# Altium PCB KB CTRL.PcbDoc
Units mil, origin at the board's own origin, x right, y up, seen from the top; angles counter-clockwise.
Board outline 1968.5 x 1574.79 mil, 2 copper layers (Top Layer, Bottom Layer); 30 components, 29 nets, 140 pads, 23 vias.
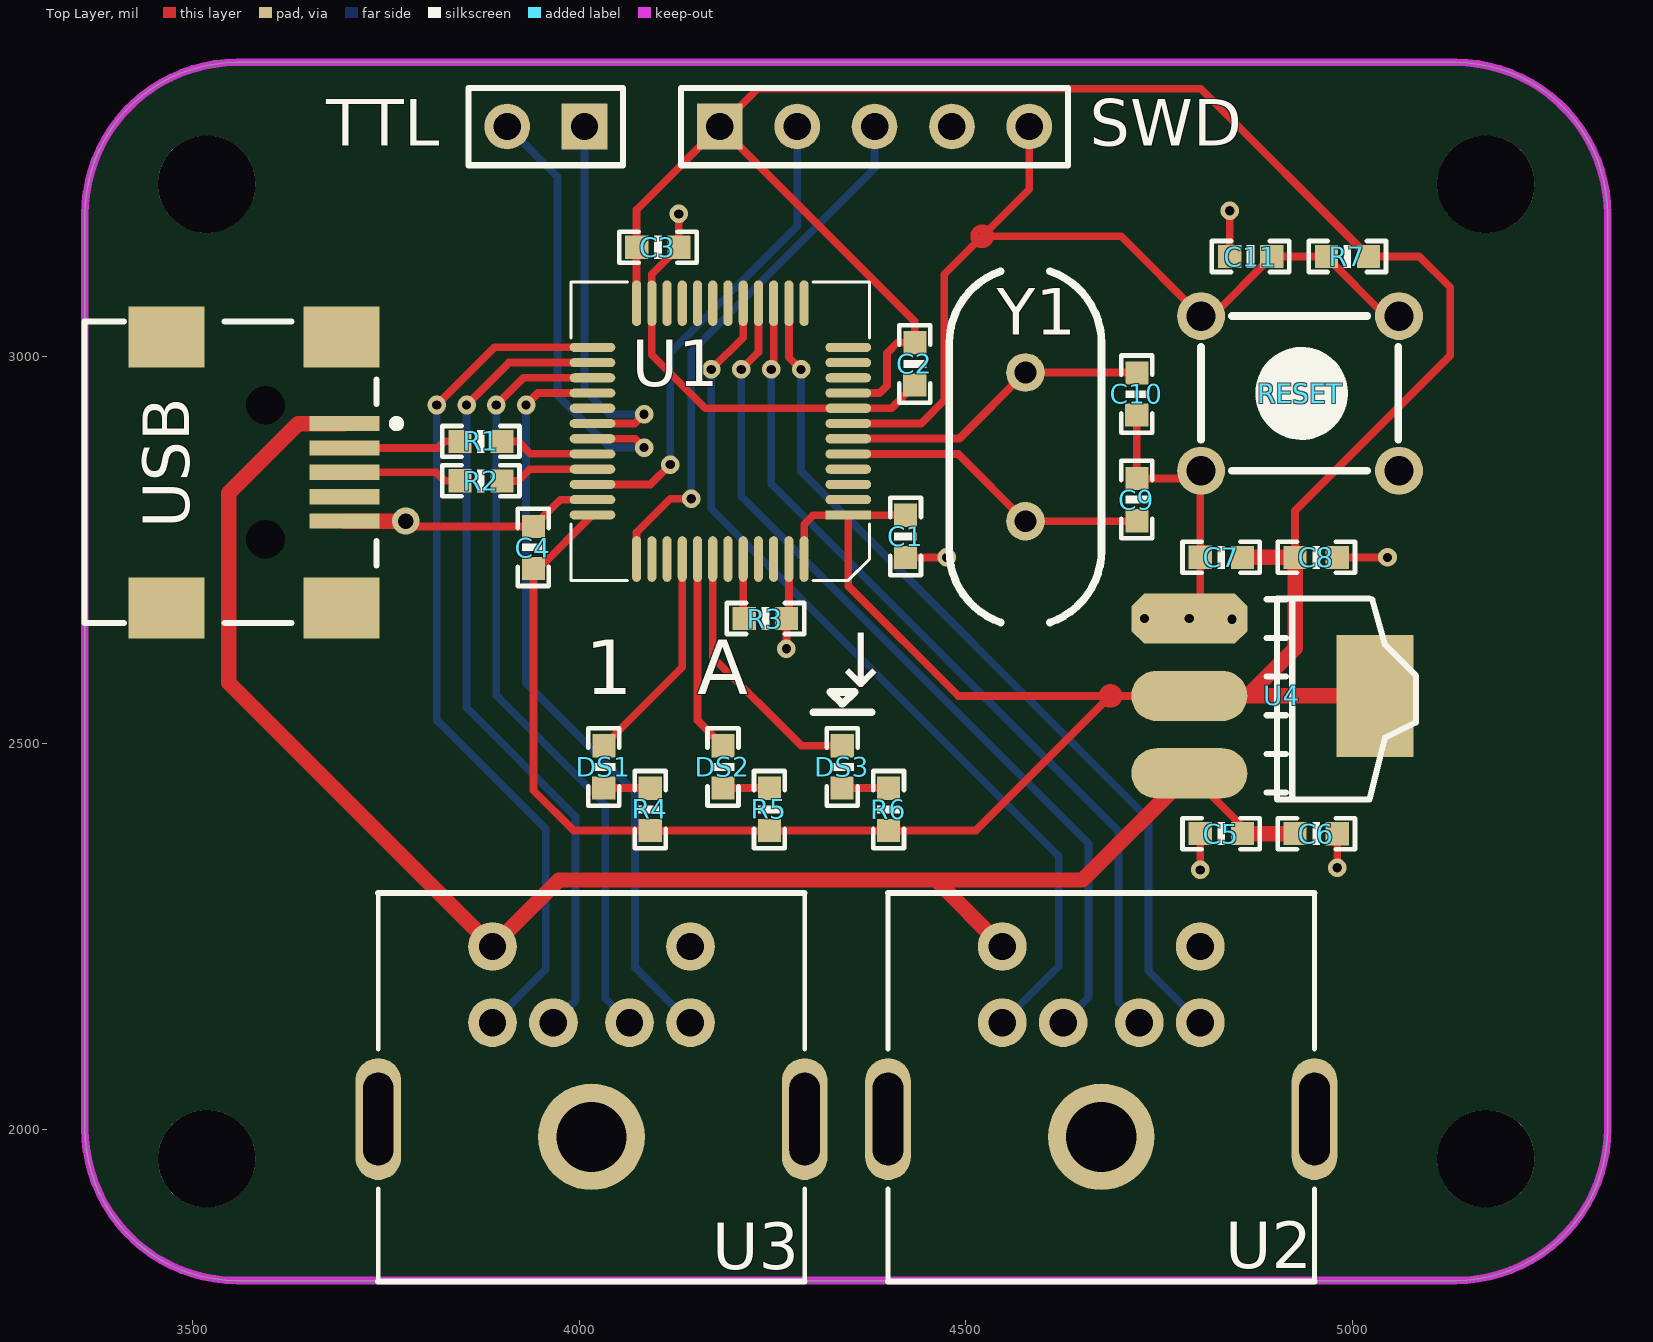
[diagram p0: Top Layer view]
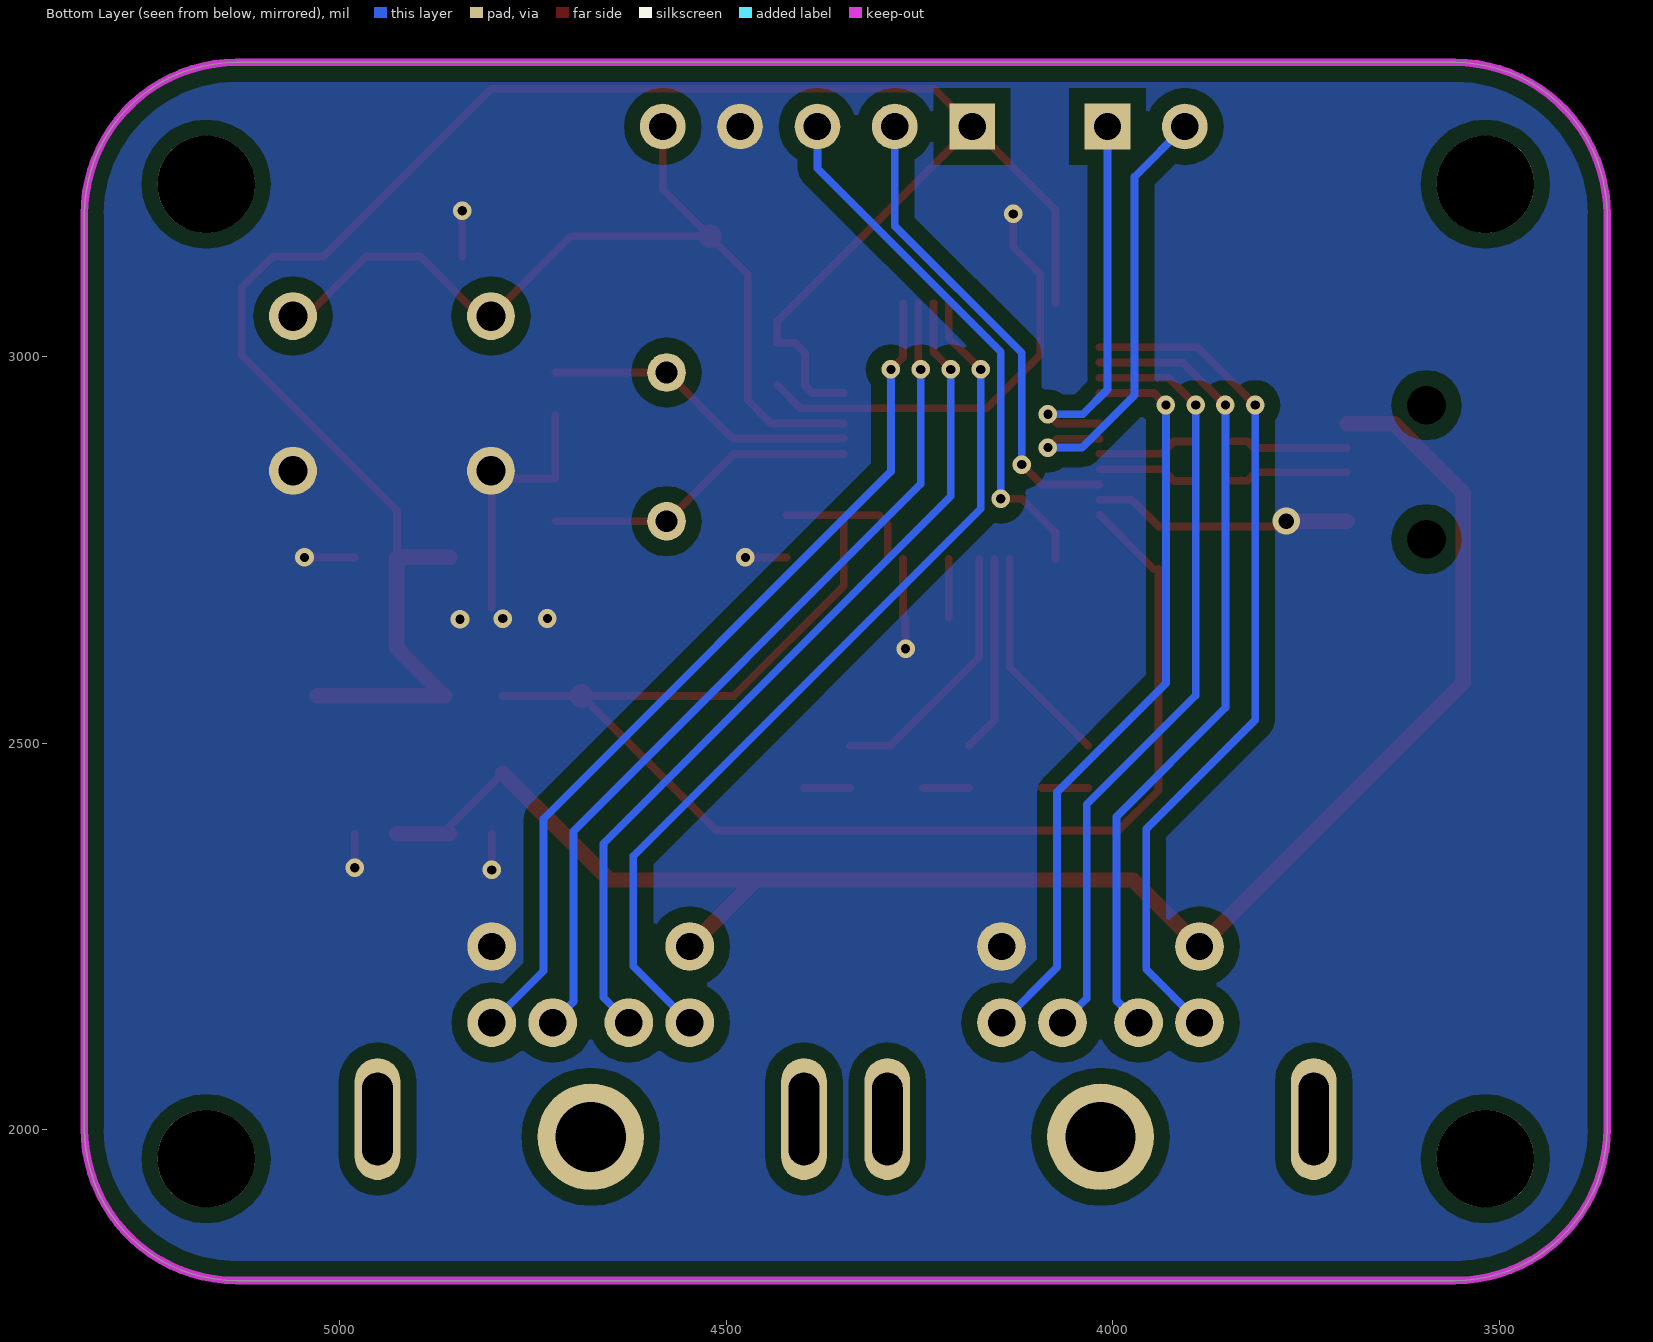
[diagram p1: Bottom Layer view, seen from below]

## Layer stack, top to bottom
Top Layer: signal copper 1.4
Dielectric: dielectric 12.6, FR-4, Dk 4.8
Bottom Layer: signal copper 1.4

## Board outline
3361.15,2002.06 3361.15,3183.15 cw(c3558,3183.15) 3558,3380 5132.8,3380 cw(c5132.8,3183.15) 5329.65,3183.15 5329.65,2002.06 cw(c5132.8,2002.06) 5132.8,1805.21 3558,1805.21 cw(c3558,2002.06)

## Design rules (kind name [scope] priority, off if disabled: settings)
Clearance Clearance_1 [InComponent('U1')] p1: gap=6
Clearance [All] p2: gap=8
ComponentClearance [All] p1: gap=0 collisioncheckmode=3 verticalgap=0 showdistances=FALSE
DiffPairsRouting [All] p1: maxlimit=10 minlimit=10 mostfreqgap=10 maxuncoupledlength=500
HoleSize [All] p1: absolutevalues=TRUE maxlimit=1000 minlimit=1 maxpercent=80.000 minpercent=20.000
HoleToHoleClearance [All] p1: gap=0 allowstackedmicrovias=TRUE
MinimumSolderMaskSliver [All] p1: minsoldermaskwidth=0
PlaneConnect [All] p1: planeconnectstyle=Direct reliefexpansion=20 reliefentries=4 reliefconductorwidth=10 reliefairgap=10
PolygonConnect [All] p1: connectstyle=Direct reliefconductorwidth=10 reliefentries=4 polygonreliefangle="90 Angle" airgapwidth=10
RoutingVias [All] p1: holewidth=28 width=50 viastyle="Through Hole" minholewidth=28 minwidth=50 maxholewidth=28 maxwidth=50
SilkToSilkClearance [All] p1: silktosilkclearance=0
SilkToSolderMaskClearance [IsPad] p1: minsilkscreentomaskgap=0 clearancetoexposedcopper=TRUE
SolderMaskExpansion [All] p1: expansion=4
Width [All] p1: maxlimit=30 minlimit=10 preferedwidth=10
20 further rules are at their usual default settings.

## Classes and differential pairs
differential pair OTG: +OTG_P -OTG_N
differential pair USB: +USB_P -USB_N
differential pair OSC: +OSC_P -OSC_N

## Components (designator, comment, footprint, x,y, rotation, side; value= is the part's Value field where it differs from the comment)
C1 "104" 0603P 4422,2767 r90 top
C2 "104" 0603P 4434,2990 r90 top
C3 "104" 0603P 4102,3141 r180 top
C4 "104" 0603P 3941,2753 r270 top
C5 "10uf" 0603P 4830,2383 r0 top
C6 "104" 0603P 4953,2382.87 r180 top
C7 "10uf" 0603P 4830,2740.13 r0 top
C8 "104" 0603P 4953,2740 r180 top
C9 "22pf" 0603P 4721.13,2815 r270 top
C10 "22pf" 0603P 4721,2951 r90 top
C11 "104" 0603P 4868,3129 r0 top
DS1 "LED1" 0603P 4032,2469 r90 top
DS2 "LED1" 0603P 4186,2469 r90 top
DS3 "LED1" 0603P 4340,2469 r90 top
R1 "10K" 0603P 3873,2890 r0 top
R2 "10K" 0603P 3873,2839 r0 top
R3 "10K" 0603P 4241,2661 r180 top
R4 "10K" 0603P 4092,2414 r90 top
R5 "10K" 0603P 4246,2414 r90 top
R6 "10K" 0603P 4400,2414 r90 top
R7 "10K" 0603P 4993,3129 r0 top
RESET "KEY_M" KEY_M 4804,3052 r0 top (schematic designator RESET?)
SWD "IIS" HDR1X5 4182,3297 r0 top (schematic designator P1)
TTL "" HDR1X2 4007,3297 r180 top (schematic designator P2)
U1 "STM32F103C8T6" LQFP48 4348,2795 r180 top
U2 "PS/2" PS2-6PIN 4675,1804 r180 top locked
U3 "PS/2" PS2-6PIN 4016,1804 r180 top locked
U4 "AMS1117-3.3" AMS1117 4789,2661 r270 top
USB "USB" USB/SM0.8-6H5 3388,2850 r180 top locked
Y1 "8MHz" XTAL_US 4577,2979 r270 top

## Footprints (in the part's own frame and the unit in brackets; to place one, negate y for a bottom-side part, rotate by r counter-clockwise, add the part's x,y. Pads: shape width x height; smd on the part's side, far side on the other; paste and mask are expansions set on the pad)
0603P [mil]
  rect 30x30 smd: 1(-27,0) 2(27.5,-0.06)
  silkscreen extent -50,-20 50,20
AMS1117 [mil]
  oct 65x150 smd: 1(0.03,-0.06)
  oval 65x150 smd: 2(100.03,-0.06) 3(200.03,-0.06)
  rect 157.48x100 smd: 4(100.03,239.94)
  silkscreen extent -26,100 234,293
HDR1X2 [mm]
  rect 1.5x1.5 hole 0.9: 1(0,0)
  round 1.5 hole 0.9: 2(2.54,0)
  silkscreen extent -1.27,-1.27 3.81,1.27
HDR1X5 [mm]
  rect 1.5x1.5 hole 0.9: 1(0,0)
  round 1.5 hole 0.9: 2(2.54,0) 3(5.08,0) 4(7.62,0) 5(10.16,0)
  silkscreen extent -1.27,-1.27 11.43,1.27
KEY_M [mil]
  round 62 hole 38: 1(0,0) 1(255.91,0) 2(0,-200) 2(255.91,-200)
  silkscreen extent 0,-200 255,0
LQFP48 [mm]
  rect 1.5x0.3 smd: 1(0,0)
  oval 1.5x0.3 smd: 2(0,-0.5) 3(0,-1) 4(0,-1.5) 5(0,-2) 6(0,-2.5) 7(0,-3) 8(0,-3.5) 9(0,-4) 10(0,-4.5) 11(0,-5) 12(0,-5.5) 25(8.4,-5.5) 26(8.4,-5) 27(8.4,-4.5) 28(8.4,-4) 29(8.4,-3.5) 30(8.4,-3) 31(8.4,-2.5) 32(8.4,-2) 33(8.4,-1.5) 34(8.4,-1) 35(8.4,-0.5) 36(8.4,0)
  oval 0.3x1.5 smd: 13(1.45,-6.95) 14(1.95,-6.95) 15(2.45,-6.95) 16(2.95,-6.95) 17(3.45,-6.95) 18(3.95,-6.95) 19(4.45,-6.95) 20(4.95,-6.95) 21(5.45,-6.95) 22(5.95,-6.95) 23(6.45,-6.95) 24(6.95,-6.95) 37(6.95,1.45) 38(6.45,1.45) 39(5.95,1.45) 40(5.45,1.45) 41(4.95,1.45) 42(4.45,1.45) 43(3.95,1.45) 44(3.45,1.45) 45(2.95,1.45) 46(2.45,1.45) 47(1.95,1.45) 48(1.45,1.45)
  silkscreen extent -0.7,-7.65 9.1,2.15
PS2-6PIN [mm]
  round 1.6 hole 0.9: 1(-1.25,-8.5) 2(1.25,-8.5) 3(-3.25,-8.5) 4(3.25,-8.5) 5(-3.25,-11) 6(3.25,-11)
  oval 1.5x4 hole 1 slot 3.048 at 90 deg: 7(-7,-5.334) 9(7,-5.334)
  round 3.5 hole 2.3: S(0,-4.75)
  silkscreen extent -7,-12.75 7,0
USB/SM0.8-6H5 [mm]
  rect 2.3x0.5 smd: 1(-7.85,-1.6) 2(-7.85,-0.8) 3(-7.85,0) 4(-7.85,0.8) 5(-7.85,1.6)
  rect 2.5x2 smd: 6(-7.75,4.45) 7(-1.996,4.45) 8(-7.75,-4.45) 9(-1.996,-4.45)
  round 0.6 hole 1.27 unplated: MH1(-5.25,2.2) MH2(-5.25,-2.2)
  silkscreen extent -9.68,-4.95 0.7,4.95
XTAL_US [mil]
  round 50 hole 28: 1(0,0) 2(192.13,0)
  silkscreen extent -131,-98 323,98

## Part data
C1 C2 C3 C4 C5 C6 C7 C8 C9 C10 C11: library part C
DS1 DS2 DS3: library part LED2, "Typical RED, GREEN, YELLOW, AMBER GaAs LED"
R1 R2 R3 R4 R5 R6 R7: library part R
SWD: library part "Header 5", "Header, 5-Pin"
TTL: library part "Header 2", "Header, 2-Pin"
U2 U3: library part P/S2
U4: library part AMS1117
USB: library part USB5
Y1: library part XTAL, "Crystal Oscillator"

## Free pads (board coordinates)
  round 125.98 hole 125.98: ""(3518.63,1962.69) ""(3518.63,3222.54) ""(5172.17,1962.69) ""(5172.17,3222.54)

## Via types
v1: diameter 24, hole 12, Top Layer to Bottom Layer, 22 vias
v2: diameter 35, hole 20, Top Layer to Bottom Layer, 1 vias

## Nets (pads, with @x,y where several pads share a name; then routed paths per layer and width w, separated by ;. In a path a pad name is that pad's centre, name@x,y a point inside that pad or via, vN(x,y) a via of type N, cw(c..) or ccw(c..) an arc to the next point about the centre after c; other vN are vias at no path point)
3.3V: C1.2 C2.2 C3.2 C4.2 C7.2 C8.2 R4.1 R5.1 R6.1 R7.2 SWD.1 U1.1 U1.9 U1.24 U1.36 U1.48 U4.2 U4.4 | length 4796.4
  Top Layer w10: C4.2 3940.94,2439.06 3993,2387 R4.1 R5.1 R6.1 4513,2387 4686.97,2560.97 ; C4.2@3947.79,2725.5 U1.36 ; U1.24 4074.38,3189.38 SWD.1 ; U1.48 4290.91,2782.91 4302.5,2794.5 U1.1@4348,2794.5 ; U1.1 U1.1@4348,2794.5 ; U1.9 4388.48,2952.48 4398,2962 4398,3004 4411.5,3017.5 C2.2 4434.06,3044.94 SWD.1 ; C1.2 U1.1@4348,2794.5 ; U4.2 4686.97,2560.97 ; C8.2 4925.5,2800.5 5126,3001 5126,3089 5086.06,3128.94 R7.2 4803.44,3346 4231,3346 SWD.1 ; U1.1@4348,2794.5 4348,2703 4490.03,2560.97 4686.97,2560.97 ; 4697.25,2560.97 ccw(c4686.97,2560.97) 4697.25,2560.97
  Top Layer w20: C7.2 C8.2 4925.5,2622.47 4864,2560.97 U4.4
5V: C5.2 C6.2 U2.6 U3.6 U4.3 USB.1 | length 2204.1
  Top Layer w10: U4.3 4857.5,2392.4 C5.2
  Top Layer w20: USB.1 3636.99,2912.99 3547,2823 3547,2578.12 U3.6 3973.98,2323 4461.12,2323 ; U2.6 4461.12,2323 ; U4.3 4650.97,2323 4461.12,2323 ; C5.2 C6.2
GND: C1.1 C2.1 C3.1 C4.1 C5.1 C6.1 C7.1 C8.1 C9.1 C10.1 C11.1 R3.1 RESET.2 SWD.4 U1.8 U1.23 U1.35 U1.47 U2.5 U3.5 U4.1 USB.5 | length 1616.7
  Top Layer w10: v2@3783,2780 C4.1 3975.69,2814.69 U1.35 ; v1(4129,3184) C3.1 4094.06,3106.06 U1.23 4094.06,3001.94 4163.2,2932.8 U1.8 4403.8,2932.8 C2.1 ; v1(4268,2622) R3.1 ; R3.1@4271.23,2664.23 U1.47 ; C1.1 v1(4475,2740) ; C10.1 4721,2842.13 RESET.2@4794.13,2842.13 ; v1(4803,2336) C5.1 ; U4.1@4803,2675.03 C7.1 RESET.2@4803,2851 ; C11.1 v1(4841,3188) ; v1(4980,2339) C6.1 ; C8.1 v1(5045,2740)
  Top Layer w20: USB.5 v2(3775.99,2787.01)
  other v1: 4844,2660 4731,2661 4788.94,2660.97
LED1: DS1.2 U1.40 | length 283.4
  Top Layer w10: DS1.2 4133.43,2597.87 U1.40
LED2: DS2.2 U1.41 | length 255.1
  Top Layer w10: U1.41 4153.12,2529.45 DS2.2
LED3: DS3.2 U1.42 | length 341.5
  Top Layer w10: U1.42 4172.8,2611.2 4287.5,2496.5 DS3.2
NetDS1_1: DS1.1 R4.2 | length 59.6
  Top Layer w10: DS1.1 R4.2@4091.56,2442
NetDS2_1: DS2.1 R5.2 | length 59.6
  Top Layer w10: DS2.1 R5.2@4245.56,2442
NetDS3_1: DS3.1 R6.2 | length 59.6
  Top Layer w10: DS3.1 R6.2@4399.56,2442
NetR3_2: R3.2 U1.44 | length 75.5
  Top Layer w10: R3.2@4212.17,2662.39 U1.44
OSC_N: C9.2 U1.5 Y1.2 | length 408.4
  Top Layer w10: U1.5 4490.13,2873.74 Y1.2 C9.2@4720.44,2786.87
OSC_P: C10.2 U1.6 Y1.1 | length 407.9
  Top Layer w10: U1.6@4348,2893.74 4491.74,2893.74 Y1.1 C10.2@4720.56,2979
OTG_N: R1.2 U1.32 | length 203.8
  Top Layer w10: R1.2 3921,2889.94 3936.88,2874.06 ; 3936.88,2874.06 4017.29,2874.06 3936.88,2874.06
OTG_P: R2.2 U1.33 | length 123.1
  Top Layer w10: R2.2 3921,2838.94 3936.12,2854.06 U1.33
RST: C11.2 R7.1 RESET.1 SWD.5 U1.7 | length 1229.1
  Top Layer w10: U1.7 4442.11,2913.11 4472,2943 4472,3106 4521,3155 ; SWD.5 4582,3216 4521,3155 ; RESET.1@5043,3052 R7.1 4895.56,3129 C11.2 4818.56,3052 4804,3052 4701,3155 4521,3155 ; 4531.3,3155 ccw(c4521,3155) 4531.3,3155
RXD: TTL.2 U1.31 | length 585.5
  Top Layer w10: U1.31 4072.57,2893.43 v1(4084,2882)
  Bottom Layer w10: TTL.2 3972,3232 3972,2950 4040,2882 v1(4084,2882)
SPI1_MISO: U1.16 U2.2 | length 1138.8
  Top Layer w10: v1(4209.67,2983) 4231.86,3005.19 U1.16
  Bottom Layer w10: v1(4209.67,2983) 4209.67,2818.97 4658.67,2369.97 4658.67,2171.52 U2.2
SPI1_MOSI: U1.17 U2.4 | length 1163.2
  Top Layer w10: v1(4171,2983) 4212.17,3024.17 U1.17
  Bottom Layer w10: v1(4171,2983) 4171,2802.95 4620,2353.95 4620,2211.6 U2.4
SPI1_NSS: U1.14 U2.3 | length 1150.2
  Top Layer w10: U1.14 4271.23,2998.77 v1(4287,2983)
  Bottom Layer w10: v1(4287,2983) 4287,2851 4736,2402 4736,2205.6 U2.3
SPI1_SCK: U1.15 U2.1 | length 1123.9
  Top Layer w10: v1@4251.54,2986.21 U1.15
  Bottom Layer w10: v1(4248.33,2983) 4248.33,2834.98 4697.33,2385.98 4697.33,2165.52 U2.1
SPI2_MISO: U1.27 U3.1 | length 1008.5
  Top Layer w10: v1(3893,2937) 3928.17,2972.17 U1.27
  Bottom Layer w10: v1(3893,2937) 3893,2561.63 4033.89,2420.74 4033.89,2169.97 U3.1
SPI2_MOSI: U1.28 U3.3 | length 978.6
  Top Layer w10: v1(3931.44,2937) 3946.92,2952.48 U1.28
  Bottom Layer w10: v1(3931.44,2937) 3931.44,2577.56 4072.33,2436.67 4072.33,2210.26 U3.3
SPI2_NSS: U1.25 U3.4 | length 1117.3
  Top Layer w10: v1(3816.11,2937) 3890.65,3011.54 U1.25
  Bottom Layer w10: v1(3816.11,2937) 3816.11,2529.78 3957,2388.89 3957,2207.6 U3.4
SPI2_SCK: U1.26 U3.2 | length 1054
  Top Layer w10: v1(3854.56,2937) 3909.41,2991.85 U1.26
  Bottom Layer w10: v1(3854.56,2937) 3854.56,2545.71 3995.44,2404.82 3995.44,2167.3 U3.2
SWCLK: SWD.3 U1.37 | length 702.3
  Top Layer w10: U1.37 4074.38,2772.38 4118,2816 v1(4145,2816)
  Bottom Layer w10: v1(4145,2816) 4145,3006 4382,3243 SWD.3
SWDIO: SWD.2 U1.34 | length 616.3
  Top Layer w10: U1.34 4092.37,2834.37 v1(4118,2860)
  Bottom Layer w10: v1(4118,2860) 4118,3004.46 4282,3168.46 SWD.2
TXD: TTL.1 U1.30 | length 501.9
  Top Layer w10: U1.30 4072.11,2913.11 v1(4084,2925)
  Bottom Layer w10: TTL.1 4007,2957 4039,2925 v1(4084,2925)
USB_N: R1.1 USB.2 | length 152.5
  Top Layer w10: USB.2 3817.5,2881.5 3826,2890 R1.1
USB_P: R2.1 USB.3 | length 153.5
  Top Layer w10: USB.3 3815,2850 3826,2839 R2.1
pads on no net: U1.2 U1.3 U1.4 U1.10 U1.11 U1.12 U1.13 U1.18 U1.19 U1.20 U1.21 U1.22 U1.29 U1.38 U1.39 U1.43 U1.45 U1.46 U2.7 U2.9 U2.S U3.7 U3.9 U3.S USB.4 USB.6 USB.7 USB.8 USB.9 USB.MH1 USB.MH2

## Polygon pours and split planes (outlines as drawn)
GND on Bottom Layer "Top Layer-No Net" (solid, remove dead copper, pour order 2): 3205,1723 3228,1746 5609,1746 5609,3289 5453,3445 5419,3411 3122,3411

## Keep-outs
Keep-Out Layer:
  the board outline again, w10

## Silkscreen, mask and mechanical layers (free items; w line width, h text height)
Top Overlay:
  lines w10: 4303,2540 4378.11,2540 ; 4325,2566 4340,2551 4341,2551 4356,2566 4325,2566
  text "↓" at 4324,2549 h120
  text "1" at 4008,2540 h120
  text "A" at 4153,2540 h120